# Altium PCB PCB_V0.PcbDoc (part 4 of 4)
Units mm, origin at the board's own origin, x right, y up, seen from the top; angles counter-clockwise.
Board outline 107.95 x 48.89 mm, 4 copper layers (Top Layer, Layer 1, Layer 2, Bottom Layer), stack 1.586 mm thick; 377 components, 276 nets, 880 pads, 284 vias.
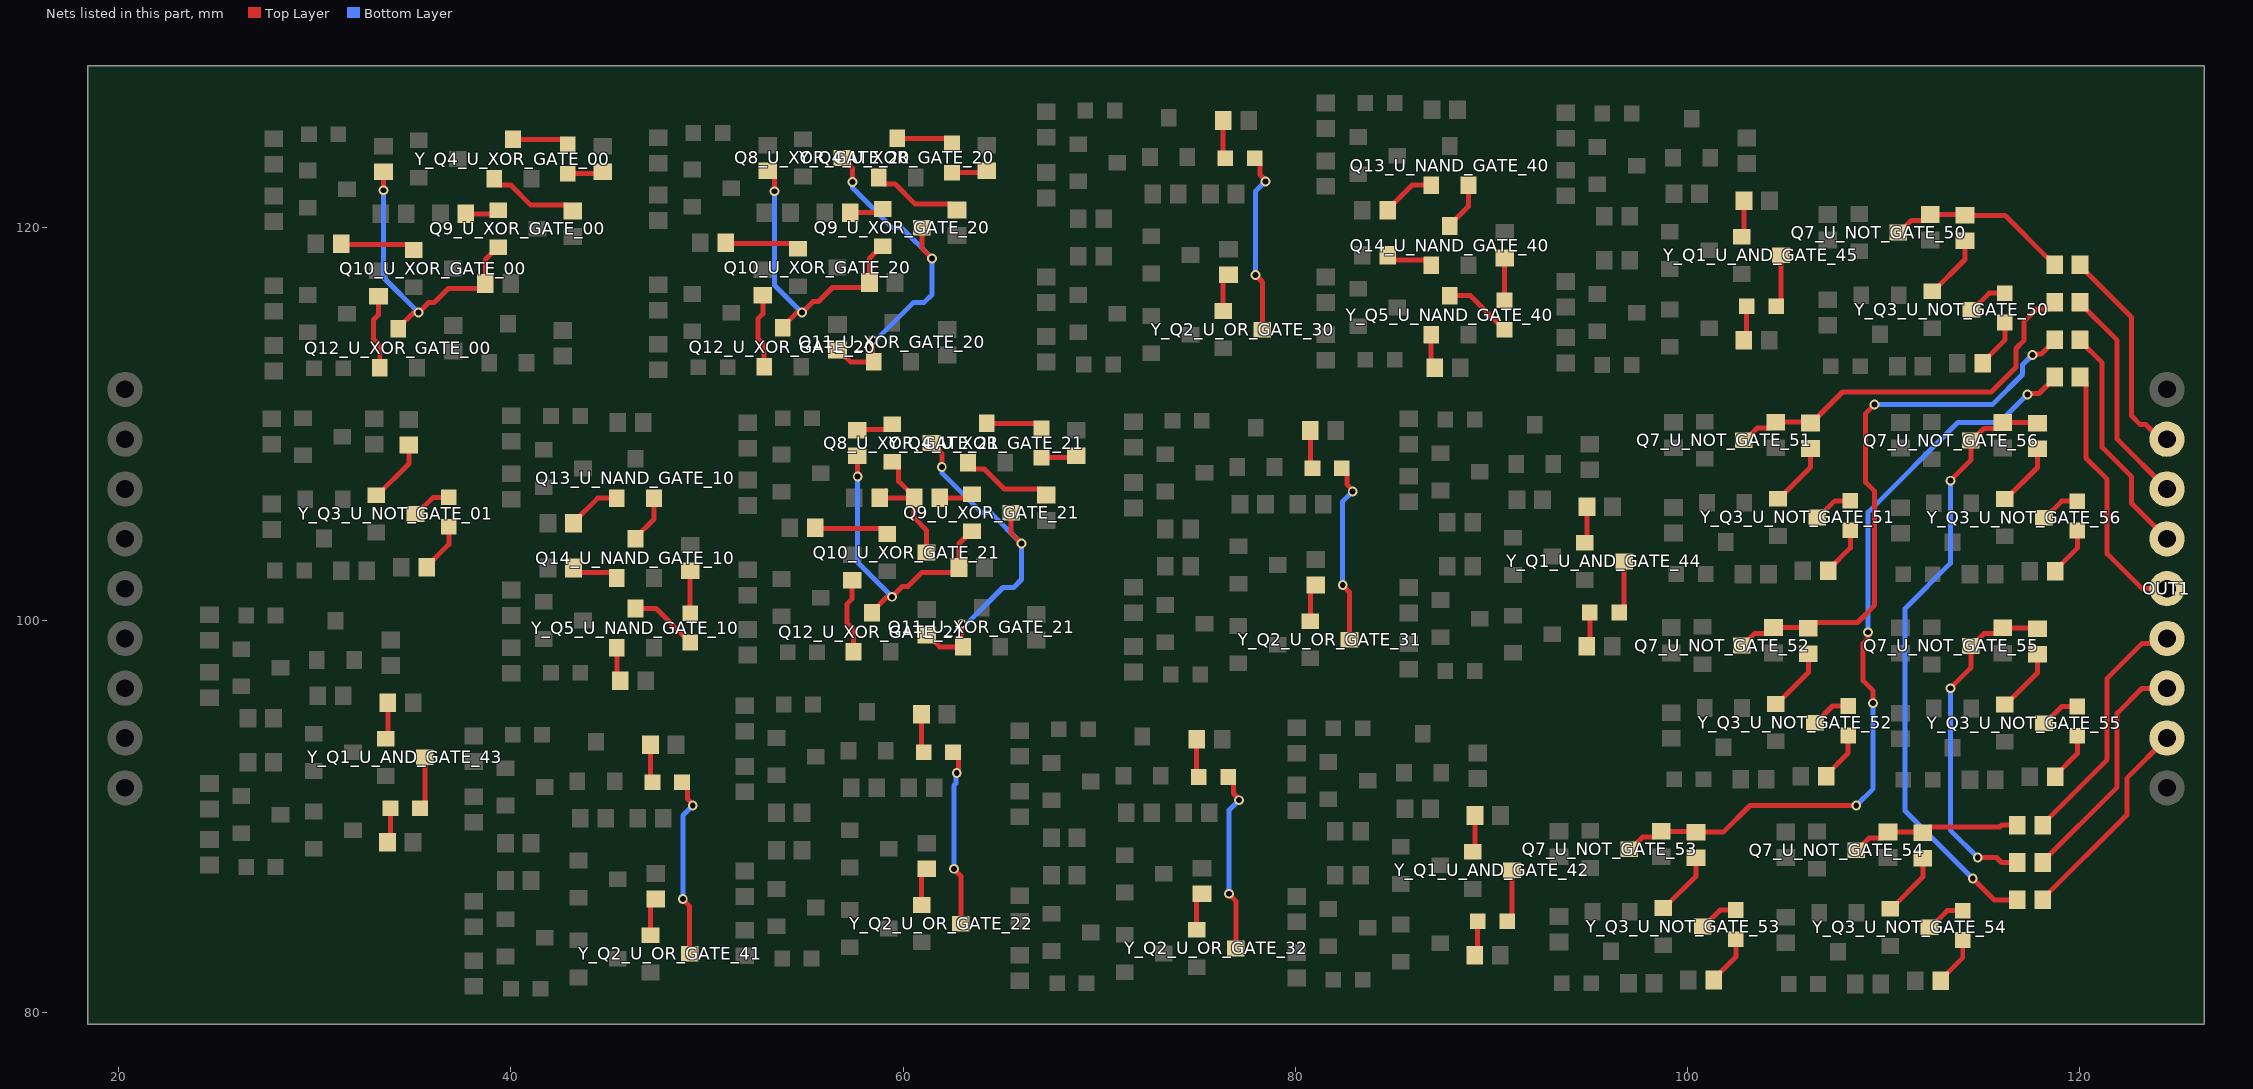
[diagram p6: the nets of this part, all layers, seen from the top]

## Via types
v1: diameter 0.5, hole 0.3, Top Layer to Bottom Layer, 284 vias

## Nets (pads, with @x,y where several pads share a name; then routed paths per layer and width w, separated by ;. In a path a pad name is that pad's centre, name@x,y a point inside that pad or via, vN(x,y) a via of type N, cw(c..) or ccw(c..) an arc to the next point about the centre after c; other vN are vias at no path point) (continued)
NetQ8_U_XOR_GATE_20_3: Q8_U_XOR_GATE_20.3 Q9_U_XOR_GATE_20.3 Q11_U_XOR_GATE_20.1 R15_U_XOR_GATE_20.1 | length 18.2
  Top Layer w0.254: R15_U_XOR_GATE_20.1@56.656,113.772 56.706,113.772 57.31,113.168 Q11_U_XOR_GATE_20.1@58.5,113.168 58.434,113.234 v1(58.434,114.265) ; Q8_U_XOR_GATE_20.3@56.894,123.566 56.944,123.566 57.217,123.293 57.217,123.243 57.418,123.042 v1(57.418,122.343) ; Q9_U_XOR_GATE_20.3@60.908,120.01 Q9_U_XOR_GATE_20.3@60.958,120.01 60.958,118.968 v1(61.482,118.444)
  Bottom Layer w0.254: v1(57.418,122.343) 57.418,122.042 59.45,120.01 59.916,120.01 v1(61.482,118.444) 61.482,116.603 61.079,116.2 60.542,116.2 58.607,114.265 v1(58.434,114.265)
NetQ8_U_XOR_GATE_21_1: Q8_U_XOR_GATE_21.1 R17_U_XOR_GATE_21.2 | length 1.9
  Top Layer w0.254: R17_U_XOR_GATE_21.2@57.658,109.677 57.685,109.704 59.179,109.704 Q8_U_XOR_GATE_21.1@59.452,109.977
NetQ8_U_XOR_GATE_21_2: Q8_U_XOR_GATE_21.2 Q10_U_XOR_GATE_21.3 R18_U_XOR_GATE_21.1 R19_U_XOR_GATE_21.1 | length 8.1
  Top Layer w0.254: R19_U_XOR_GATE_21.1@59.129,106.596 58.816,106.283 R19_U_XOR_GATE_21.1@58.816,106.233 R18_U_XOR_GATE_21.1@60.564,106.233 ; Q8_U_XOR_GATE_21.2@59.129,107.804 59.402,108.077 Q8_U_XOR_GATE_21.2@59.452,108.077 59.502,108.077 59.775,107.804 59.775,107.072 60.564,106.283 R18_U_XOR_GATE_21.1@60.564,106.233 ; Q10_U_XOR_GATE_21.3@61.198,103.439 61.198,104.583 60.564,105.217 R18_U_XOR_GATE_21.1@60.564,106.233
NetQ8_U_XOR_GATE_21_3: Q8_U_XOR_GATE_21.3 Q9_U_XOR_GATE_21.3 Q11_U_XOR_GATE_21.1 R15_U_XOR_GATE_21.1 | length 18.3
  Top Layer w0.254: R15_U_XOR_GATE_21.1@61.214,99.233 61.264,99.233 61.868,98.629 Q11_U_XOR_GATE_21.1@63.058,98.629 62.992,98.695 v1(62.992,99.813) ; Q8_U_XOR_GATE_21.3@61.452,109.027 61.502,109.027 61.775,108.754 61.775,108.704 61.976,108.503 v1(61.976,107.804) ; Q9_U_XOR_GATE_21.3@65.466,105.471 Q9_U_XOR_GATE_21.3@65.516,105.471 65.516,104.429 v1(66.04,103.905)
  Bottom Layer w0.254: v1(61.976,107.804) 61.976,107.503 64.008,105.471 64.474,105.471 v1(66.04,103.905) 66.04,102.064 65.637,101.661 65.1,101.661 63.252,99.813 v1(62.992,99.813)
NetQ9_U_XOR_GATE_00_1: Q9_U_XOR_GATE_00.1 R18_U_XOR_GATE_00.2 | length 1.7
  Top Layer w0.254: R18_U_XOR_GATE_00.2@37.704,120.717 39.168,120.717 Q9_U_XOR_GATE_00.1@39.356,120.905
NetQ9_U_XOR_GATE_00_2: Q9_U_XOR_GATE_00.2 Q12_U_XOR_GATE_00.3 R17_U_XOR_GATE_00.1 R20_U_XOR_GATE_00.1 | length 15.5
  Top Layer w0.254: R17_U_XOR_GATE_00.1@33.498,122.861 33.503,122.856 v1(33.503,121.92) ; Q12_U_XOR_GATE_00.3@34.26,114.859 34.26,114.909 35.028,115.677 v1(35.292,115.677) 35.807,116.192 36.085,116.192 36.8,116.907 38.436,116.907 R20_U_XOR_GATE_00.1@38.69,117.161 38.69,118.389 39.306,119.005 Q9_U_XOR_GATE_00.2@39.356,119.005
  Bottom Layer w0.254: v1(33.503,121.92) 33.503,117.466 v1(35.292,115.677)
NetQ9_U_XOR_GATE_20_1: Q9_U_XOR_GATE_20.1 R18_U_XOR_GATE_20.2 | length 1.7
  Top Layer w0.254: R18_U_XOR_GATE_20.2@57.306,120.772 58.77,120.772 Q9_U_XOR_GATE_20.1@58.958,120.96
NetQ9_U_XOR_GATE_20_2: Q9_U_XOR_GATE_20.2 Q12_U_XOR_GATE_20.3 R17_U_XOR_GATE_20.1 R20_U_XOR_GATE_20.1 | length 15.5
  Top Layer w0.254: R17_U_XOR_GATE_20.1@53.1,122.916 53.442,122.574 v1(53.442,121.869) ; Q12_U_XOR_GATE_20.3@53.862,114.914 53.862,114.964 54.575,115.677 v1(54.844,115.677) 55.414,116.247 55.687,116.247 56.402,116.962 58.038,116.962 R20_U_XOR_GATE_20.1@58.292,117.216 58.292,118.444 58.908,119.06 Q9_U_XOR_GATE_20.2@58.958,119.06
  Bottom Layer w0.254: v1(53.442,121.869) 53.442,117.079 v1(54.844,115.677)
NetQ9_U_XOR_GATE_21_1: Q9_U_XOR_GATE_21.1 R18_U_XOR_GATE_21.2 | length 1.7
  Top Layer w0.254: R18_U_XOR_GATE_21.2@61.864,106.233 63.328,106.233 Q9_U_XOR_GATE_21.1@63.516,106.421
NetQ9_U_XOR_GATE_21_2: Q9_U_XOR_GATE_21.2 Q12_U_XOR_GATE_21.3 R17_U_XOR_GATE_21.1 R20_U_XOR_GATE_21.1 | length 15.5
  Top Layer w0.254: R17_U_XOR_GATE_21.1@57.658,108.377 57.685,108.35 v1(57.685,107.315) ; Q12_U_XOR_GATE_21.3@58.42,100.375 58.42,100.425 59.177,101.182 v1(59.436,101.182) 59.962,101.708 60.245,101.708 60.96,102.423 62.596,102.423 R20_U_XOR_GATE_21.1@62.85,102.677 62.85,103.905 63.466,104.521 Q9_U_XOR_GATE_21.2@63.516,104.521
  Bottom Layer w0.254: v1(57.685,107.315) 57.685,102.933 v1(59.436,101.182)
NetQ10_U_XOR_GATE_00_1: Q10_U_XOR_GATE_00.1 R21_U_XOR_GATE_00.2 | length 3.8
  Top Layer w0.254: R21_U_XOR_GATE_00.2@31.354,119.193 31.401,119.146 34.765,119.146 Q10_U_XOR_GATE_00.1@35.038,118.873
NetQ10_U_XOR_GATE_20_1: Q10_U_XOR_GATE_20.1 R21_U_XOR_GATE_20.2 | length 3.8
  Top Layer w0.254: R21_U_XOR_GATE_20.2@50.956,119.248 51.003,119.201 54.367,119.201 Q10_U_XOR_GATE_20.1@54.64,118.928
NetQ10_U_XOR_GATE_21_1: Q10_U_XOR_GATE_21.1 R21_U_XOR_GATE_21.2 | length 3.8
  Top Layer w0.254: R21_U_XOR_GATE_21.2@55.514,104.709 55.561,104.662 58.925,104.662 Q10_U_XOR_GATE_21.1@59.198,104.389
NetQ12_U_XOR_GATE_00_1: Q12_U_XOR_GATE_00.1 R22_U_XOR_GATE_00.2 | length 3.9
  Top Layer w0.254: R22_U_XOR_GATE_00.2@33.244,116.511 33.244,115.561 32.99,115.307 32.99,114.321 33.31,114.001 Q12_U_XOR_GATE_00.1@33.31,112.859
NetQ12_U_XOR_GATE_20_1: Q12_U_XOR_GATE_20.1 R22_U_XOR_GATE_20.2 | length 3.9
  Top Layer w0.254: R22_U_XOR_GATE_20.2@52.846,116.566 52.846,115.616 52.592,115.362 52.592,114.376 52.912,114.056 Q12_U_XOR_GATE_20.1@52.912,112.914
NetQ12_U_XOR_GATE_21_1: Q12_U_XOR_GATE_21.1 R22_U_XOR_GATE_21.2 | length 3.9
  Top Layer w0.254: R22_U_XOR_GATE_21.2@57.404,102.027 57.404,101.077 57.15,100.823 57.15,99.837 57.47,99.517 Q12_U_XOR_GATE_21.1@57.47,98.375
NetQ13_U_NAND_GATE_10_1: Q13_U_NAND_GATE_10.1 R23_U_NAND_GATE_10.2 | length 2.8
  Top Layer w0.254: R23_U_NAND_GATE_10.2@43.189,104.932 43.189,104.982 44.425,106.218 Q13_U_NAND_GATE_10.1@45.399,106.218
NetQ13_U_NAND_GATE_10_2: Q13_U_NAND_GATE_10.2 Q14_U_NAND_GATE_10.3 | length 2.5
  Top Layer w0.254: Q14_U_NAND_GATE_10.3@46.349,104.139 46.349,104.189 47.299,105.139 Q13_U_NAND_GATE_10.2@47.299,106.218
NetQ13_U_NAND_GATE_40_1: Q13_U_NAND_GATE_40.1 R23_U_NAND_GATE_40.2 | length 2.8
  Top Layer w0.254: R23_U_NAND_GATE_40.2@84.724,120.89 84.724,120.94 85.96,122.176 Q13_U_NAND_GATE_40.1@86.934,122.176
NetQ13_U_NAND_GATE_40_2: Q13_U_NAND_GATE_40.2 Q14_U_NAND_GATE_40.3 | length 2.5
  Top Layer w0.254: Q14_U_NAND_GATE_40.3@87.884,120.097 87.884,120.147 88.834,121.097 Q13_U_NAND_GATE_40.2@88.834,122.176
NetQ14_U_NAND_GATE_10_1: Q14_U_NAND_GATE_10.1 R24_U_NAND_GATE_10.2 | length 2.4
  Top Layer w0.254: R24_U_NAND_GATE_10.2@43.189,102.649 43.426,102.412 45.126,102.412 Q14_U_NAND_GATE_10.1@45.399,102.139
NetQ14_U_NAND_GATE_40_1: Q14_U_NAND_GATE_40.1 R24_U_NAND_GATE_40.2 | length 2.4
  Top Layer w0.254: R24_U_NAND_GATE_40.2@84.724,118.607 84.961,118.37 86.661,118.37 Q14_U_NAND_GATE_40.1@86.934,118.097
NetR4_1: Q7_U_NOT_GATE_50.3 R4.1 RO3_U_NOT_GATE_50.1 Y_R3_U_NOT_GATE_50.2 | length 9.4
  Top Layer w0.254: Q7_U_NOT_GATE_50.3@110.759,119.76 110.809,119.76 111.431,120.382 112.082,120.382 RO3_U_NOT_GATE_50.1@112.38,120.68 114.116,120.68 Y_R3_U_NOT_GATE_50.2@114.158,120.638 116.202,120.638 118.382,118.458 118.432,118.458 118.73,118.16 R4.1@118.73,118.11
NetR5_1: Q7_U_NOT_GATE_51.3 R5.1 RO3_U_NOT_GATE_51.1 Y_R3_U_NOT_GATE_51.2 | length 19.9
  Top Layer w0.254: Q7_U_NOT_GATE_51.3@102.885,109.168 102.935,109.168 103.557,109.79 104.208,109.79 RO3_U_NOT_GATE_51.1@104.506,110.088 106.242,110.088 Y_R3_U_NOT_GATE_51.2@106.284,110.046 106.334,110.046 107.917,111.629 115.495,111.629 116.764,112.898 116.764,113.849 117.162,114.247 117.162,115.206 117.813,115.857 118.432,115.857 118.73,116.155 R5.1@118.73,116.205
NetR6_1: Q7_U_NOT_GATE_52.3 R6.1 RO3_U_NOT_GATE_52.1 Y_R3_U_NOT_GATE_52.2 | length 29.1
  Top Layer w0.254: Q7_U_NOT_GATE_52.3@102.773,98.699 102.823,98.699 103.445,99.321 104.096,99.321 RO3_U_NOT_GATE_52.1@104.394,99.619 106.13,99.619 Y_R3_U_NOT_GATE_52.2@106.172,99.577 106.47,99.875 108.674,99.875 109.552,100.753 109.552,106.569 109.097,107.024 109.097,110.543 v1(109.552,110.998) ; v1(117.602,113.518) 117.649,113.565 118.045,113.565 118.73,114.25 R6.1@118.73,114.3
  Bottom Layer w0.254: v1(109.552,110.998) 115.57,110.998 117.094,112.522 117.094,113.01 v1(117.602,113.518)
NetR7_1: Q7_U_NOT_GATE_53.3 R7.1 RO3_U_NOT_GATE_53.1 Y_R3_U_NOT_GATE_53.2 | length 40.6
  Top Layer w0.254: Q7_U_NOT_GATE_53.3@97.043,88.302 97.093,88.302 97.715,88.924 98.366,88.924 RO3_U_NOT_GATE_53.1@98.664,89.222 100.4,89.222 Y_R3_U_NOT_GATE_53.2@100.442,89.18 101.834,89.18 103.191,90.537 v1(108.615,90.537) ; v1(109.22,99.375) 109.22,99.062 108.966,98.808 108.966,96.898 109.474,96.39 v1(109.474,95.758) ; v1(117.348,111.506) 117.395,111.553 117.938,111.553 118.73,112.345 R7.1@118.73,112.395
  Bottom Layer w0.254: v1(108.615,90.537) 109.474,91.396 v1(109.474,95.758) ; v1(109.22,99.375) 109.22,105.501 113.792,110.073 115.915,110.073 v1(117.348,111.506)
NetR8_1: Q7_U_NOT_GATE_54.3 R8.1 RO3_U_NOT_GATE_54.1 Y_R3_U_NOT_GATE_54.2 | length 8.8
  Top Layer w0.254: Q7_U_NOT_GATE_54.3@108.615,88.264 108.665,88.264 109.287,88.886 109.938,88.886 RO3_U_NOT_GATE_54.1@110.236,89.184 111.972,89.184 Y_R3_U_NOT_GATE_54.2@112.014,89.142 112.312,89.44 115.924,89.44 116.019,89.535 R8.1@116.825,89.535
NetR9_1: Q7_U_NOT_GATE_55.3 R9.1 RO3_U_NOT_GATE_55.1 Y_R3_U_NOT_GATE_55.2 | length 17.7
  Top Layer w0.254: v1(113.414,96.52) 114.457,97.563 Q7_U_NOT_GATE_55.3@114.457,98.678 114.507,98.678 115.129,99.3 115.78,99.3 RO3_U_NOT_GATE_55.1@116.078,99.598 117.814,99.598 Y_R3_U_NOT_GATE_55.2@117.856,99.556 ; v1(114.808,87.884) 115.765,87.884 116.019,87.63 R9.1@116.825,87.63
  Bottom Layer w0.254: v1(113.414,96.52) 113.414,89.278 v1(114.808,87.884)
NetR10_1: Q7_U_NOT_GATE_56.3 R10.1 RO3_U_NOT_GATE_56.1 Y_R3_U_NOT_GATE_56.2 | length 31.7
  Top Layer w0.254: v1(113.414,107.107) 114.457,108.15 Q7_U_NOT_GATE_56.3@114.457,109.153 114.507,109.153 115.129,109.775 115.78,109.775 RO3_U_NOT_GATE_56.1@116.078,110.073 117.814,110.073 Y_R3_U_NOT_GATE_56.2@117.856,110.031 ; v1(114.554,86.815) 115.644,85.725 R10.1@116.825,85.725
  Bottom Layer w0.254: v1(113.414,107.107) 113.414,102.888 111.11,100.584 111.11,90.259 v1(114.554,86.815)
NetY_D1_U_AND_GATE_42_1: Y_D1_U_AND_GATE_42.1 Y_RD1_U_AND_GATE_42.2 | length 1.8
  Top Layer w0.254: Y_RD1_U_AND_GATE_42.2@89.154,82.9 89.308,83.054 Y_D1_U_AND_GATE_42.1@89.308,84.632
NetY_D1_U_AND_GATE_42_2: Y_D1_U_AND_GATE_42.2 Y_Q1_U_AND_GATE_42.3 | length 2.7
  Top Layer w0.254: Y_D1_U_AND_GATE_42.2@90.808,84.632 91.058,84.882 Y_Q1_U_AND_GATE_42.3@91.058,87.233
NetY_D1_U_AND_GATE_43_1: Y_D1_U_AND_GATE_43.1 Y_RD1_U_AND_GATE_43.2 | length 1.8
  Top Layer w0.254: Y_RD1_U_AND_GATE_43.2@33.706,88.661 33.86,88.815 Y_D1_U_AND_GATE_43.1@33.86,90.393
NetY_D1_U_AND_GATE_43_2: Y_D1_U_AND_GATE_43.2 Y_Q1_U_AND_GATE_43.3 | length 2.7
  Top Layer w0.254: Y_D1_U_AND_GATE_43.2@35.36,90.393 35.61,90.643 Y_Q1_U_AND_GATE_43.3@35.61,92.994
NetY_D1_U_AND_GATE_44_1: Y_D1_U_AND_GATE_44.1 Y_RD1_U_AND_GATE_44.2 | length 1.8
  Top Layer w0.254: Y_RD1_U_AND_GATE_44.2@94.87,98.654 95.024,98.808 Y_D1_U_AND_GATE_44.1@95.024,100.386
NetY_D1_U_AND_GATE_44_2: Y_D1_U_AND_GATE_44.2 Y_Q1_U_AND_GATE_44.3 | length 2.7
  Top Layer w0.254: Y_D1_U_AND_GATE_44.2@96.524,100.386 96.774,100.636 Y_Q1_U_AND_GATE_44.3@96.774,102.987
NetY_D1_U_AND_GATE_45_1: Y_D1_U_AND_GATE_45.1 Y_RD1_U_AND_GATE_45.2 | length 1.8
  Top Layer w0.254: Y_RD1_U_AND_GATE_45.2@102.874,114.265 103.028,114.419 Y_D1_U_AND_GATE_45.1@103.028,115.997
NetY_D1_U_AND_GATE_45_2: Y_D1_U_AND_GATE_45.2 Y_Q1_U_AND_GATE_45.3 | length 2.7
  Top Layer w0.254: Y_D1_U_AND_GATE_45.2@104.528,115.997 104.778,116.247 Y_Q1_U_AND_GATE_45.3@104.778,118.598
NetY_D2_U_OR_GATE_22_1: Y_D2_U_OR_GATE_22.1 Y_RD2_U_OR_GATE_22.2 | length 2
  Top Layer w0.254: Y_RD2_U_OR_GATE_22.2@60.944,95.184 60.944,93.368 Y_D2_U_OR_GATE_22.1@61.051,93.261
NetY_D2_U_OR_GATE_22_2: Y_D2_U_OR_GATE_22.2 Y_Q2_U_OR_GATE_22.3 | length 9.1
  Top Layer w0.254: Y_D2_U_OR_GATE_22.2@62.551,93.261 62.824,92.988 62.824,92.425 62.785,92.386 62.785,92.249 v1(62.738,92.202) ; v1(62.594,87.31) 62.594,87.295 62.944,86.945 Y_Q2_U_OR_GATE_22.3@62.944,84.516
  Bottom Layer w0.254: v1(62.594,87.31) 62.594,91.572 62.691,91.669 62.691,92.155 v1(62.738,92.202)
NetY_D2_U_OR_GATE_30_1: Y_D2_U_OR_GATE_30.1 Y_RD2_U_OR_GATE_30.2 | length 2
  Top Layer w0.254: Y_RD2_U_OR_GATE_30.2@76.328,125.476 76.328,123.66 Y_D2_U_OR_GATE_30.1@76.435,123.553
NetY_D2_U_OR_GATE_30_2: Y_D2_U_OR_GATE_30.2 Y_Q2_U_OR_GATE_30.3 | length 9.3
  Top Layer w0.254: Y_D2_U_OR_GATE_30.2@77.935,123.553 78.208,123.28 78.208,122.717 78.486,122.439 v1(78.486,122.372) ; v1(77.978,117.602) 77.978,117.587 78.328,117.237 Y_Q2_U_OR_GATE_30.3@78.328,114.808
  Bottom Layer w0.254: v1(77.978,117.602) 77.978,121.864 v1(78.486,122.372)
NetY_D2_U_OR_GATE_31_1: Y_D2_U_OR_GATE_31.1 Y_RD2_U_OR_GATE_31.2 | length 2
  Top Layer w0.254: Y_RD2_U_OR_GATE_31.2@80.772,109.662 80.772,107.846 Y_D2_U_OR_GATE_31.1@80.879,107.739
NetY_D2_U_OR_GATE_31_2: Y_D2_U_OR_GATE_31.2 Y_Q2_U_OR_GATE_31.3 | length 9.3
  Top Layer w0.254: Y_D2_U_OR_GATE_31.2@82.379,107.739 82.652,107.466 82.652,106.903 82.93,106.625 v1(82.93,106.558) ; v1(82.422,101.788) 82.422,101.773 82.772,101.423 Y_Q2_U_OR_GATE_31.3@82.772,98.994
  Bottom Layer w0.254: v1(82.422,101.788) 82.422,106.05 v1(82.93,106.558)
NetY_D2_U_OR_GATE_32_1: Y_D2_U_OR_GATE_32.1 Y_RD2_U_OR_GATE_32.2 | length 2
  Top Layer w0.254: Y_RD2_U_OR_GATE_32.2@74.972,93.914 74.972,92.098 Y_D2_U_OR_GATE_32.1@75.079,91.991
NetY_D2_U_OR_GATE_32_2: Y_D2_U_OR_GATE_32.2 Y_Q2_U_OR_GATE_32.3 | length 9.3
  Top Layer w0.254: Y_D2_U_OR_GATE_32.2@76.579,91.991 76.852,91.718 76.852,91.155 77.13,90.877 v1(77.13,90.81) ; v1(76.622,86.04) 76.622,86.025 76.972,85.675 Y_Q2_U_OR_GATE_32.3@76.972,83.246
  Bottom Layer w0.254: v1(76.622,86.04) 76.622,90.302 v1(77.13,90.81)
NetY_D2_U_OR_GATE_41_1: Y_D2_U_OR_GATE_41.1 Y_RD2_U_OR_GATE_41.2 | length 2
  Top Layer w0.254: Y_RD2_U_OR_GATE_41.2@47.118,93.641 47.118,91.825 Y_D2_U_OR_GATE_41.1@47.225,91.718
NetY_D2_U_OR_GATE_41_2: Y_D2_U_OR_GATE_41.2 Y_Q2_U_OR_GATE_41.3 | length 9.3
  Top Layer w0.254: Y_D2_U_OR_GATE_41.2@48.725,91.718 48.998,91.445 48.998,90.882 49.276,90.604 v1(49.276,90.537) ; v1(48.768,85.767) 48.768,85.752 49.118,85.402 Y_Q2_U_OR_GATE_41.3@49.118,82.973
  Bottom Layer w0.254: v1(48.768,85.767) 48.768,90.029 v1(49.276,90.537)
NetY_D3_U_NOT_GATE_01_1: Y_D3_U_NOT_GATE_01.1 Y_RD3_U_NOT_GATE_01.2 | length 2.5
  Top Layer w0.254: Y_RD3_U_NOT_GATE_01.2@35.702,102.682 35.702,102.732 36.83,103.86 Y_D3_U_NOT_GATE_01.1@36.83,104.757
NetY_D3_U_NOT_GATE_01_2: Y_D3_U_NOT_GATE_01.2 Y_Q3_U_NOT_GATE_01.3 | length 2
  Top Layer w0.254: Y_Q3_U_NOT_GATE_01.3@35.135,105.41 35.185,105.41 36.032,106.257 Y_D3_U_NOT_GATE_01.2@36.83,106.257
NetY_D3_U_NOT_GATE_50_1: Y_D3_U_NOT_GATE_50.1 Y_RD3_U_NOT_GATE_50.2 | length 2.5
  Top Layer w0.254: Y_RD3_U_NOT_GATE_50.2@115.062,113.096 115.062,113.146 116.19,114.274 Y_D3_U_NOT_GATE_50.1@116.19,115.171
NetY_D3_U_NOT_GATE_50_2: Y_D3_U_NOT_GATE_50.2 Y_Q3_U_NOT_GATE_50.3 | length 2
  Top Layer w0.254: Y_Q3_U_NOT_GATE_50.3@114.495,115.824 114.545,115.824 115.392,116.671 Y_D3_U_NOT_GATE_50.2@116.19,116.671
NetY_D3_U_NOT_GATE_51_1: Y_D3_U_NOT_GATE_51.1 Y_RD3_U_NOT_GATE_51.2 | length 2.5
  Top Layer w0.254: Y_RD3_U_NOT_GATE_51.2@107.188,102.504 107.188,102.554 108.316,103.682 Y_D3_U_NOT_GATE_51.1@108.316,104.579
NetY_D3_U_NOT_GATE_51_2: Y_D3_U_NOT_GATE_51.2 Y_Q3_U_NOT_GATE_51.3 | length 2
  Top Layer w0.254: Y_Q3_U_NOT_GATE_51.3@106.621,105.232 106.671,105.232 107.518,106.079 Y_D3_U_NOT_GATE_51.2@108.316,106.079
NetY_D3_U_NOT_GATE_52_1: Y_D3_U_NOT_GATE_52.1 Y_RD3_U_NOT_GATE_52.2 | length 2.5
  Top Layer w0.254: Y_RD3_U_NOT_GATE_52.2@107.076,92.035 107.076,92.085 108.204,93.213 Y_D3_U_NOT_GATE_52.1@108.204,94.11
NetY_D3_U_NOT_GATE_52_2: Y_D3_U_NOT_GATE_52.2 Y_Q3_U_NOT_GATE_52.3 | length 2
  Top Layer w0.254: Y_Q3_U_NOT_GATE_52.3@106.509,94.763 106.559,94.763 107.406,95.61 Y_D3_U_NOT_GATE_52.2@108.204,95.61
NetY_D3_U_NOT_GATE_53_1: Y_D3_U_NOT_GATE_53.1 Y_RD3_U_NOT_GATE_53.2 | length 2.5
  Top Layer w0.254: Y_RD3_U_NOT_GATE_53.2@101.346,81.638 101.346,81.688 102.474,82.816 Y_D3_U_NOT_GATE_53.1@102.474,83.713
NetY_D3_U_NOT_GATE_53_2: Y_D3_U_NOT_GATE_53.2 Y_Q3_U_NOT_GATE_53.3 | length 2
  Top Layer w0.254: Y_Q3_U_NOT_GATE_53.3@100.779,84.366 100.829,84.366 101.676,85.213 Y_D3_U_NOT_GATE_53.2@102.474,85.213
NetY_D3_U_NOT_GATE_54_1: Y_D3_U_NOT_GATE_54.1 Y_RD3_U_NOT_GATE_54.2 | length 2.5
  Top Layer w0.254: Y_RD3_U_NOT_GATE_54.2@112.918,81.6 112.918,81.65 114.046,82.778 Y_D3_U_NOT_GATE_54.1@114.046,83.675
NetY_D3_U_NOT_GATE_54_2: Y_D3_U_NOT_GATE_54.2 Y_Q3_U_NOT_GATE_54.3 | length 2
  Top Layer w0.254: Y_Q3_U_NOT_GATE_54.3@112.351,84.328 112.401,84.328 113.248,85.175 Y_D3_U_NOT_GATE_54.2@114.046,85.175
NetY_D3_U_NOT_GATE_55_1: Y_D3_U_NOT_GATE_55.1 Y_RD3_U_NOT_GATE_55.2 | length 2.5
  Top Layer w0.254: Y_RD3_U_NOT_GATE_55.2@118.76,92.014 118.76,92.064 119.888,93.192 Y_D3_U_NOT_GATE_55.1@119.888,94.089
NetY_D3_U_NOT_GATE_55_2: Y_D3_U_NOT_GATE_55.2 Y_Q3_U_NOT_GATE_55.3 | length 2
  Top Layer w0.254: Y_Q3_U_NOT_GATE_55.3@118.193,94.742 118.243,94.742 119.09,95.589 Y_D3_U_NOT_GATE_55.2@119.888,95.589
NetY_D3_U_NOT_GATE_56_1: Y_D3_U_NOT_GATE_56.1 Y_RD3_U_NOT_GATE_56.2 | length 2.5
  Top Layer w0.254: Y_RD3_U_NOT_GATE_56.2@118.76,102.489 118.76,102.539 119.888,103.667 Y_D3_U_NOT_GATE_56.1@119.888,104.564
NetY_D3_U_NOT_GATE_56_2: Y_D3_U_NOT_GATE_56.2 Y_Q3_U_NOT_GATE_56.3 | length 2
  Top Layer w0.254: Y_Q3_U_NOT_GATE_56.3@118.193,105.217 118.243,105.217 119.09,106.064 Y_D3_U_NOT_GATE_56.2@119.888,106.064
NetY_D4_U_XOR_GATE_00_1: Y_D4_U_XOR_GATE_00.1 Y_RD4_U_XOR_GATE_00.2 | length 1.8
  Top Layer w0.254: Y_D4_U_XOR_GATE_00.1@42.896,122.761 44.574,122.761 Y_RD4_U_XOR_GATE_00.2@44.674,122.861
NetY_D4_U_XOR_GATE_00_2: Y_D4_U_XOR_GATE_00.2 Y_Q4_U_XOR_GATE_00.3 | length 2.9
  Top Layer w0.254: Y_Q4_U_XOR_GATE_00.3@40.102,124.511 42.646,124.511 Y_D4_U_XOR_GATE_00.2@42.896,124.261
NetY_D4_U_XOR_GATE_20_1: Y_D4_U_XOR_GATE_20.1 Y_RD4_U_XOR_GATE_20.2 | length 1.8
  Top Layer w0.254: Y_D4_U_XOR_GATE_20.1@62.498,122.816 64.176,122.816 Y_RD4_U_XOR_GATE_20.2@64.276,122.916
NetY_D4_U_XOR_GATE_20_2: Y_D4_U_XOR_GATE_20.2 Y_Q4_U_XOR_GATE_20.3 | length 2.9
  Top Layer w0.254: Y_Q4_U_XOR_GATE_20.3@59.704,124.566 62.248,124.566 Y_D4_U_XOR_GATE_20.2@62.498,124.316
NetY_D4_U_XOR_GATE_21_1: Y_D4_U_XOR_GATE_21.1 Y_RD4_U_XOR_GATE_21.2 | length 1.8
  Top Layer w0.254: Y_D4_U_XOR_GATE_21.1@67.056,108.277 68.734,108.277 Y_RD4_U_XOR_GATE_21.2@68.834,108.377
NetY_D4_U_XOR_GATE_21_2: Y_D4_U_XOR_GATE_21.2 Y_Q4_U_XOR_GATE_21.3 | length 2.9
  Top Layer w0.254: Y_Q4_U_XOR_GATE_21.3@64.262,110.027 66.806,110.027 Y_D4_U_XOR_GATE_21.2@67.056,109.777
NetY_D5_U_NAND_GATE_10_1: Y_D5_U_NAND_GATE_10.1 Y_RD5_U_NAND_GATE_10.2 | length 2.2
  Top Layer w0.254: Y_D5_U_NAND_GATE_10.1@49.143,100.348 Y_RD5_U_NAND_GATE_10.2@49.143,102.504
NetY_D5_U_NAND_GATE_10_2: Y_D5_U_NAND_GATE_10.2 Y_Q5_U_NAND_GATE_10.3 | length 3.5
  Top Layer w0.254: Y_Q5_U_NAND_GATE_10.3@46.349,100.583 47.408,100.583 Y_D5_U_NAND_GATE_10.2@49.143,98.848
NetY_D5_U_NAND_GATE_40_1: Y_D5_U_NAND_GATE_40.1 Y_RD5_U_NAND_GATE_40.2 | length 2.2
  Top Layer w0.254: Y_D5_U_NAND_GATE_40.1@90.678,116.306 Y_RD5_U_NAND_GATE_40.2@90.678,118.462
NetY_D5_U_NAND_GATE_40_2: Y_D5_U_NAND_GATE_40.2 Y_Q5_U_NAND_GATE_40.3 | length 3.5
  Top Layer w0.254: Y_Q5_U_NAND_GATE_40.3@87.884,116.541 88.943,116.541 Y_D5_U_NAND_GATE_40.2@90.678,114.806
NetY_Q1_U_AND_GATE_42_1: Y_Q1_U_AND_GATE_42.1 Y_R1_U_AND_GATE_42.1 | length 1.9
  Top Layer w0.254: Y_Q1_U_AND_GATE_42.1@89.058,88.183 89.17,88.295 Y_R1_U_AND_GATE_42.1@89.17,90.027
NetY_Q1_U_AND_GATE_43_1: Y_Q1_U_AND_GATE_43.1 Y_R1_U_AND_GATE_43.1 | length 1.9
  Top Layer w0.254: Y_Q1_U_AND_GATE_43.1@33.61,93.944 33.722,94.056 Y_R1_U_AND_GATE_43.1@33.722,95.788
NetY_Q1_U_AND_GATE_44_1: Y_Q1_U_AND_GATE_44.1 Y_R1_U_AND_GATE_44.1 | length 1.9
  Top Layer w0.254: Y_Q1_U_AND_GATE_44.1@94.774,103.937 94.886,104.049 Y_R1_U_AND_GATE_44.1@94.886,105.781
NetY_Q1_U_AND_GATE_45_1: Y_Q1_U_AND_GATE_45.1 Y_R1_U_AND_GATE_45.1 | length 1.9
  Top Layer w0.254: Y_Q1_U_AND_GATE_45.1@102.778,119.548 102.89,119.66 Y_R1_U_AND_GATE_45.1@102.89,121.392
NetY_Q2_U_OR_GATE_22_1: Y_Q2_U_OR_GATE_22.1 Y_R2_U_OR_GATE_22.1 | length 2
  Top Layer w0.254: Y_Q2_U_OR_GATE_22.1@60.944,85.466 60.944,87.038 Y_R2_U_OR_GATE_22.1@61.216,87.31
NetY_Q2_U_OR_GATE_30_1: Y_Q2_U_OR_GATE_30.1 Y_R2_U_OR_GATE_30.1 | length 2
  Top Layer w0.254: Y_Q2_U_OR_GATE_30.1@76.328,115.758 76.328,117.33 Y_R2_U_OR_GATE_30.1@76.6,117.602
NetY_Q2_U_OR_GATE_31_1: Y_Q2_U_OR_GATE_31.1 Y_R2_U_OR_GATE_31.1 | length 2
  Top Layer w0.254: Y_Q2_U_OR_GATE_31.1@80.772,99.944 80.772,101.516 Y_R2_U_OR_GATE_31.1@81.044,101.788
NetY_Q2_U_OR_GATE_32_1: Y_Q2_U_OR_GATE_32.1 Y_R2_U_OR_GATE_32.1 | length 2
  Top Layer w0.254: Y_Q2_U_OR_GATE_32.1@74.972,84.196 74.972,85.768 Y_R2_U_OR_GATE_32.1@75.244,86.04
NetY_Q2_U_OR_GATE_41_1: Y_Q2_U_OR_GATE_41.1 Y_R2_U_OR_GATE_41.1 | length 2
  Top Layer w0.254: Y_Q2_U_OR_GATE_41.1@47.118,83.923 47.118,85.495 Y_R2_U_OR_GATE_41.1@47.39,85.767
NetY_Q3_U_NOT_GATE_01_1: Y_Q3_U_NOT_GATE_01.1 Y_R3_U_NOT_GATE_01.1 | length 3.3
  Top Layer w0.254: Y_Q3_U_NOT_GATE_01.1@33.135,106.36 33.185,106.36 34.798,107.973 Y_R3_U_NOT_GATE_01.1@34.798,108.924
NetY_Q3_U_NOT_GATE_50_1: Y_Q3_U_NOT_GATE_50.1 Y_R3_U_NOT_GATE_50.1 | length 3.3
  Top Layer w0.254: Y_Q3_U_NOT_GATE_50.1@112.495,116.774 112.545,116.774 114.158,118.387 Y_R3_U_NOT_GATE_50.1@114.158,119.338
NetY_Q3_U_NOT_GATE_51_1: Y_Q3_U_NOT_GATE_51.1 Y_R3_U_NOT_GATE_51.1 | length 3.3
  Top Layer w0.254: Y_Q3_U_NOT_GATE_51.1@104.621,106.182 104.671,106.182 106.284,107.795 Y_R3_U_NOT_GATE_51.1@106.284,108.746
NetY_Q3_U_NOT_GATE_52_1: Y_Q3_U_NOT_GATE_52.1 Y_R3_U_NOT_GATE_52.1 | length 3.3
  Top Layer w0.254: Y_Q3_U_NOT_GATE_52.1@104.509,95.713 104.559,95.713 106.172,97.326 Y_R3_U_NOT_GATE_52.1@106.172,98.277
NetY_Q3_U_NOT_GATE_53_1: Y_Q3_U_NOT_GATE_53.1 Y_R3_U_NOT_GATE_53.1 | length 3.3
  Top Layer w0.254: Y_Q3_U_NOT_GATE_53.1@98.779,85.316 98.829,85.316 100.442,86.929 Y_R3_U_NOT_GATE_53.1@100.442,87.88
NetY_Q3_U_NOT_GATE_54_1: Y_Q3_U_NOT_GATE_54.1 Y_R3_U_NOT_GATE_54.1 | length 3.3
  Top Layer w0.254: Y_Q3_U_NOT_GATE_54.1@110.351,85.278 110.401,85.278 112.014,86.891 Y_R3_U_NOT_GATE_54.1@112.014,87.842
NetY_Q3_U_NOT_GATE_55_1: Y_Q3_U_NOT_GATE_55.1 Y_R3_U_NOT_GATE_55.1 | length 3.3
  Top Layer w0.254: Y_Q3_U_NOT_GATE_55.1@116.193,95.692 116.243,95.692 117.856,97.305 Y_R3_U_NOT_GATE_55.1@117.856,98.256
NetY_Q3_U_NOT_GATE_56_1: Y_Q3_U_NOT_GATE_56.1 Y_R3_U_NOT_GATE_56.1 | length 3.3
  Top Layer w0.254: Y_Q3_U_NOT_GATE_56.1@116.193,106.167 116.243,106.167 117.856,107.78 Y_R3_U_NOT_GATE_56.1@117.856,108.731
NetY_Q4_U_XOR_GATE_00_1: Y_Q4_U_XOR_GATE_00.1 Y_R4_U_XOR_GATE_00.1 | length 4.7
  Top Layer w0.254: Y_Q4_U_XOR_GATE_00.1@39.152,122.511 39.152,122.461 39.425,122.188 39.986,122.188 41.017,121.157 42.852,121.157 Y_R4_U_XOR_GATE_00.1@43.15,120.859
NetY_Q4_U_XOR_GATE_20_1: Y_Q4_U_XOR_GATE_20.1 Y_R4_U_XOR_GATE_20.1 | length 4.7
  Top Layer w0.254: Y_Q4_U_XOR_GATE_20.1@58.754,122.566 58.754,122.516 59.027,122.243 59.588,122.243 60.619,121.212 62.454,121.212 Y_R4_U_XOR_GATE_20.1@62.752,120.914
NetY_Q4_U_XOR_GATE_21_1: Y_Q4_U_XOR_GATE_21.1 Y_R4_U_XOR_GATE_21.1 | length 4.7
  Top Layer w0.254: Y_Q4_U_XOR_GATE_21.1@63.312,108.027 63.312,107.977 63.585,107.704 64.146,107.704 65.177,106.673 67.012,106.673 Y_R4_U_XOR_GATE_21.1@67.31,106.375
NetY_Q5_U_NAND_GATE_10_1: Y_Q5_U_NAND_GATE_10.1 Y_R5_U_NAND_GATE_10.1 | length 1.8
  Top Layer w0.254: Y_Q5_U_NAND_GATE_10.1@45.399,98.583 45.399,97.08 Y_R5_U_NAND_GATE_10.1@45.578,96.901
NetY_Q5_U_NAND_GATE_40_1: Y_Q5_U_NAND_GATE_40.1 Y_R5_U_NAND_GATE_40.1 | length 1.8
  Top Layer w0.254: Y_Q5_U_NAND_GATE_40.1@86.934,114.541 86.934,113.038 Y_R5_U_NAND_GATE_40.1@87.113,112.859
OA_5: OUT1.2 R4.2 | length 11.1
  Top Layer w0.254: R4.2@120.03,118.11 120.03,118.06 122.661,115.429 122.661,110.408 123.107,109.962 123.39,109.962 124.132,109.22 OUT1.2@124.46,109.22
OB_5: OUT1.3 R5.2 | length 11.4
  Top Layer w0.254: R5.2@120.03,116.205 120.03,116.155 121.92,114.265 121.92,109.22 OUT1.3@124.46,106.68
OC_5: OUT1.4 R6.2 | length 12
  Top Layer w0.254: R6.2@120.03,114.3 120.03,114.25 121.158,113.122 121.158,108.803 122.661,107.3 122.661,105.939 OUT1.4@124.46,104.14
OD_5: OUT1.5 R7.2 | length 13.4
  Top Layer w0.254: R7.2@120.03,112.395 120.328,112.097 120.328,108.254 121.412,107.17 121.412,103.378 123.179,101.611 124.449,101.611 OUT1.5@124.46,101.6
OE_5: OUT1.6 R8.2 | length 12.7
  Top Layer w0.254: R8.2@118.125,89.535 118.125,89.585 121.412,92.872 121.412,97.028 123.179,98.795 124.195,98.795 OUT1.6@124.46,99.06
OF_5: OUT1.7 R9.2 | length 12.3
  Top Layer w0.254: R9.2@118.125,87.63 118.125,87.68 121.92,91.475 121.92,95.25 123.179,96.509 124.449,96.509 OUT1.7@124.46,96.52
OG_5: OUT1.8 R10.2 | length 10.9
  Top Layer w0.254: R10.2@118.125,85.725 118.125,85.775 122.428,90.078 122.428,91.948 OUT1.8@124.46,93.98

## Polygon pours and split planes (outlines as drawn)
GND on Layer 1 "GND_L02_P004" (solid, pour order 4): 18.415,128.27 126.365,128.27 126.365,79.375 18.415,79.375
+5 on Layer 2 "+5_L03_P006" (solid, pour order 6): 18.415,128.27 126.365,128.27 126.365,79.375 18.415,79.375

## Silkscreen, mask and mechanical layers (free items; w line width, h text height)
Top Overlay:
  text "OR" at 73.008,126.39 h0.8
  text "AND" at 98.287,126.314 h0.8
  text "BCD TO 7 SEGMENT" at 109.525,126.162 h1
  text "V0.00" at 19.914,126.06 h1
  text "XOR" at 34.925,125.654 h1
  text "XOR" at 54.966,125.4 h1
  text "ARAF ISRAK" at 115.367,124.333 h1
  text "08.01.2025" at 115.418,122.428 h1
  text "NOT" at 110.287,121.666 h0.8
  text "NAND" at 79.422,120.167 h0.8
  text "VCC" at 123.19,113.64 h0.8
  text "NAND" at 37.846,111.455 h0.8
  text "VCC" at 22.149,111.354 h0.5
  text "NOT" at 31.09,111.1 h0.8
  text "OR" at 77.021,110.998 h0.8
  text "NOT" at 101.985,110.998 h0.8
  text "NOT" at 113.312,110.998 h0.8
  text "XOR" at 57.15,110.947 h1
  text "AND" at 92.927,110.744 h0.8
  text "VCC" at 22.123,109.193 h0.5
  text "A" at 122.784,108.956 h0.8
  text "B" at 122.301,106.959 h0.8 r180
  text "X" at 22.479,106.401 h0.5
  text "C" at 122.301,104.419 h0.8 r180
  text "IN4" at 22.352,103.905 h0.5
  text "D" at 122.301,101.879 h0.8 r180
  text "IN3" at 22.352,101.168 h0.5
  text "AND" at 29.566,100.686 h0.8
  text "NOT" at 101.678,100.559 h0.8
  text "NOT" at 113.762,100.497 h0.8
  text "IN2" at 22.276,99.756 h0.5
  text "E" at 122.301,99.339 h0.8 r180
  text "IN1" at 22.25,97.231 h0.5
  text "OR" at 57.31,96.291 h0.8
  text "F" at 122.276,96.088 h0.8
  text "OR" at 40.318,95.352 h0.8
  text "AND" at 84.836,95.047 h0.8
  text "OR" at 71.23,94.844 h0.8
  text "GND" at 22.149,93.599 h0.5
  text "G" at 122.123,93.509 h0.8
  text "GND" at 22.123,91.439 h0.5
  text "NOT" at 94.107,90.475 h0.8
  text "NOT" at 109.83,90.073 h0.8
  text "GND" at 123.495,88.9 h0.8
  text "BCD TO 7 SEGMENT" at 19.406,83.896 h1
  text "ARAF ISRAK" at 19.406,82.067 h1
  text "V0.00" at 120.523,80.67 h1
  text "08.01.2025" at 19.38,80.162 h1
Mechanical 1:
  the board outline again, w0.254